# Altium PCB USB Power Adapter.PcbDoc
Units mm, origin at the board's own origin, x right, y up, seen from the top; angles counter-clockwise.
Board outline 35 x 22.5 mm, 2 copper layers (Top Layer, Bottom Layer), stack 1.621 mm thick; 5 components, 2 nets, 46 pads, 4 vias.
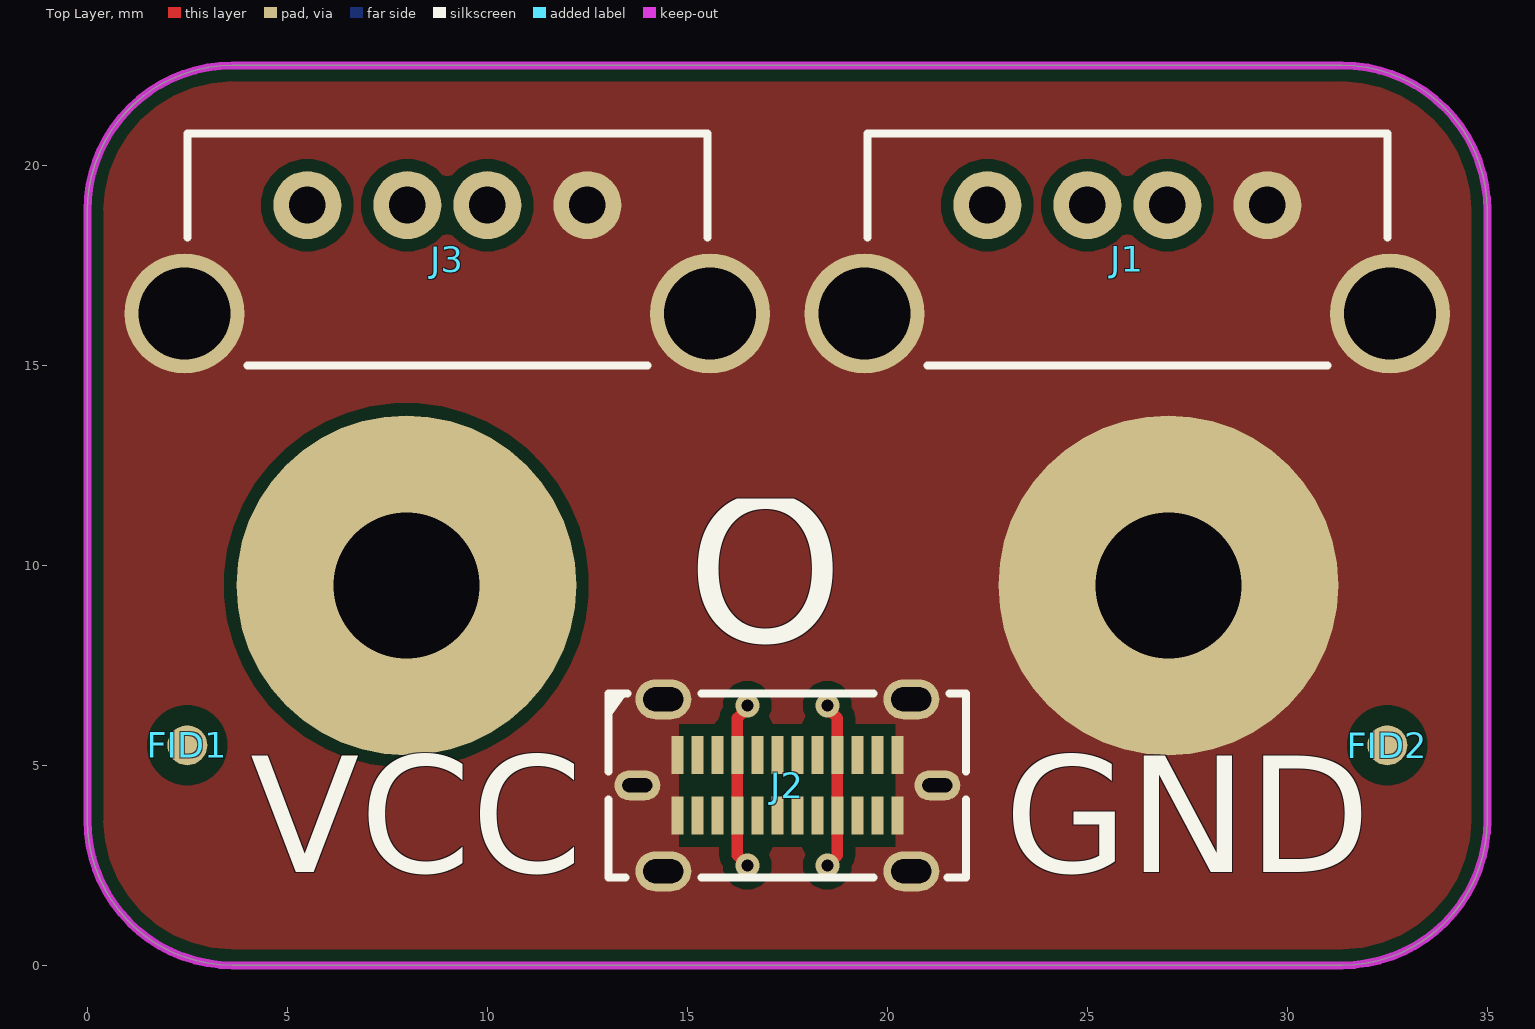
[diagram p0: Top Layer view]
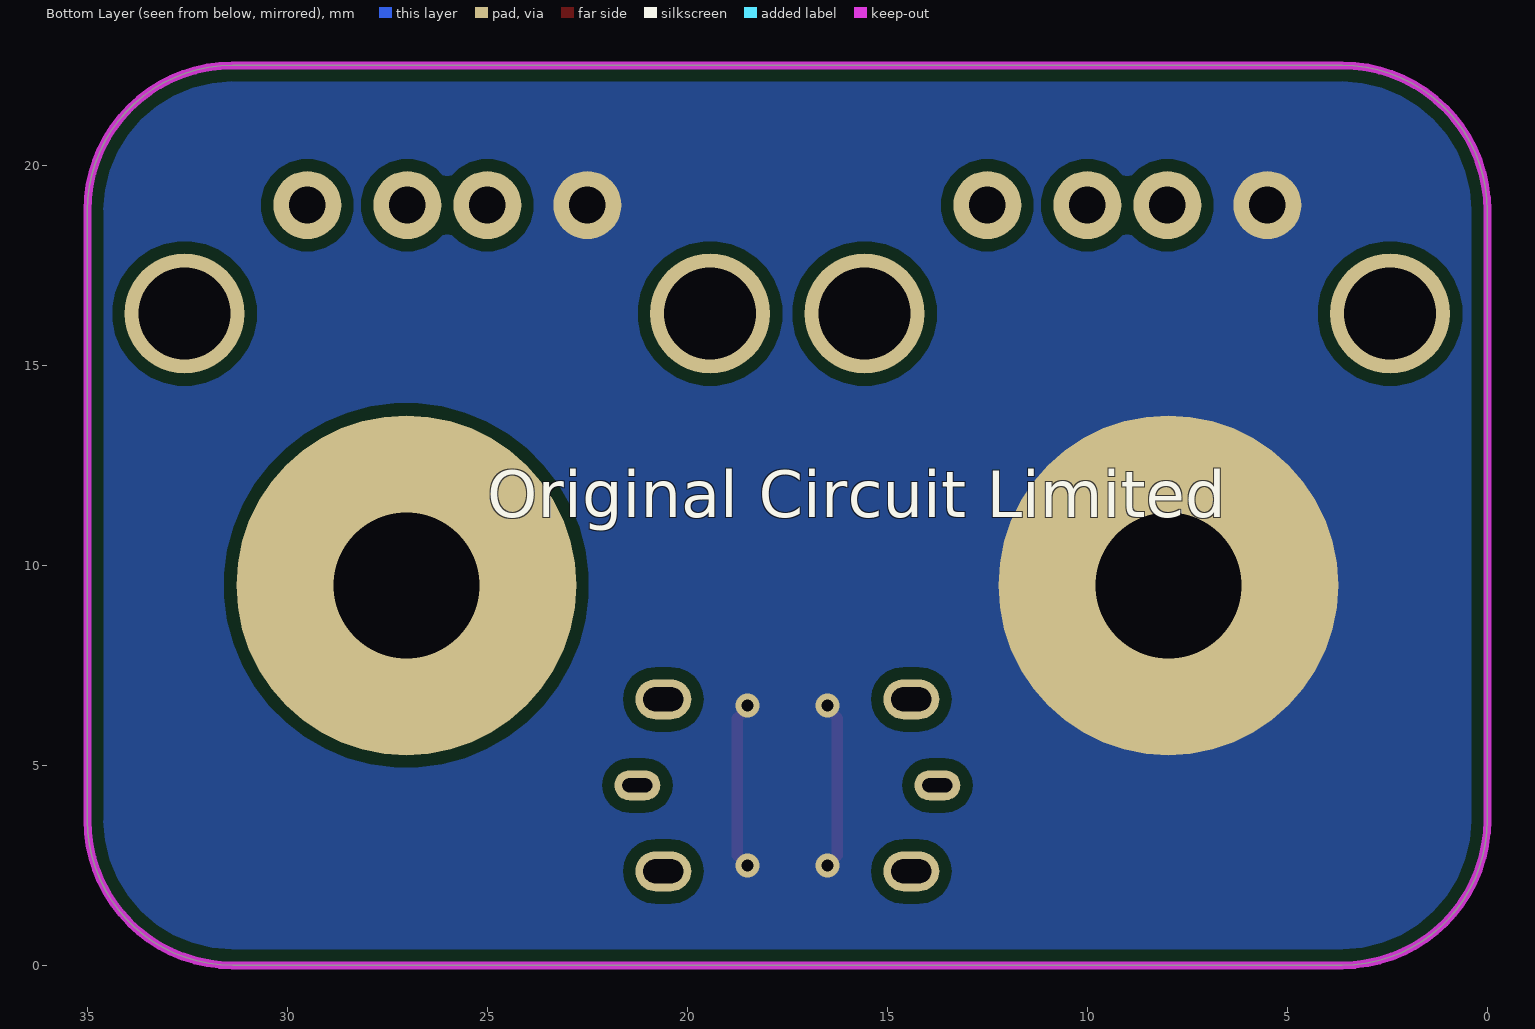
[diagram p1: Bottom Layer view, seen from below]
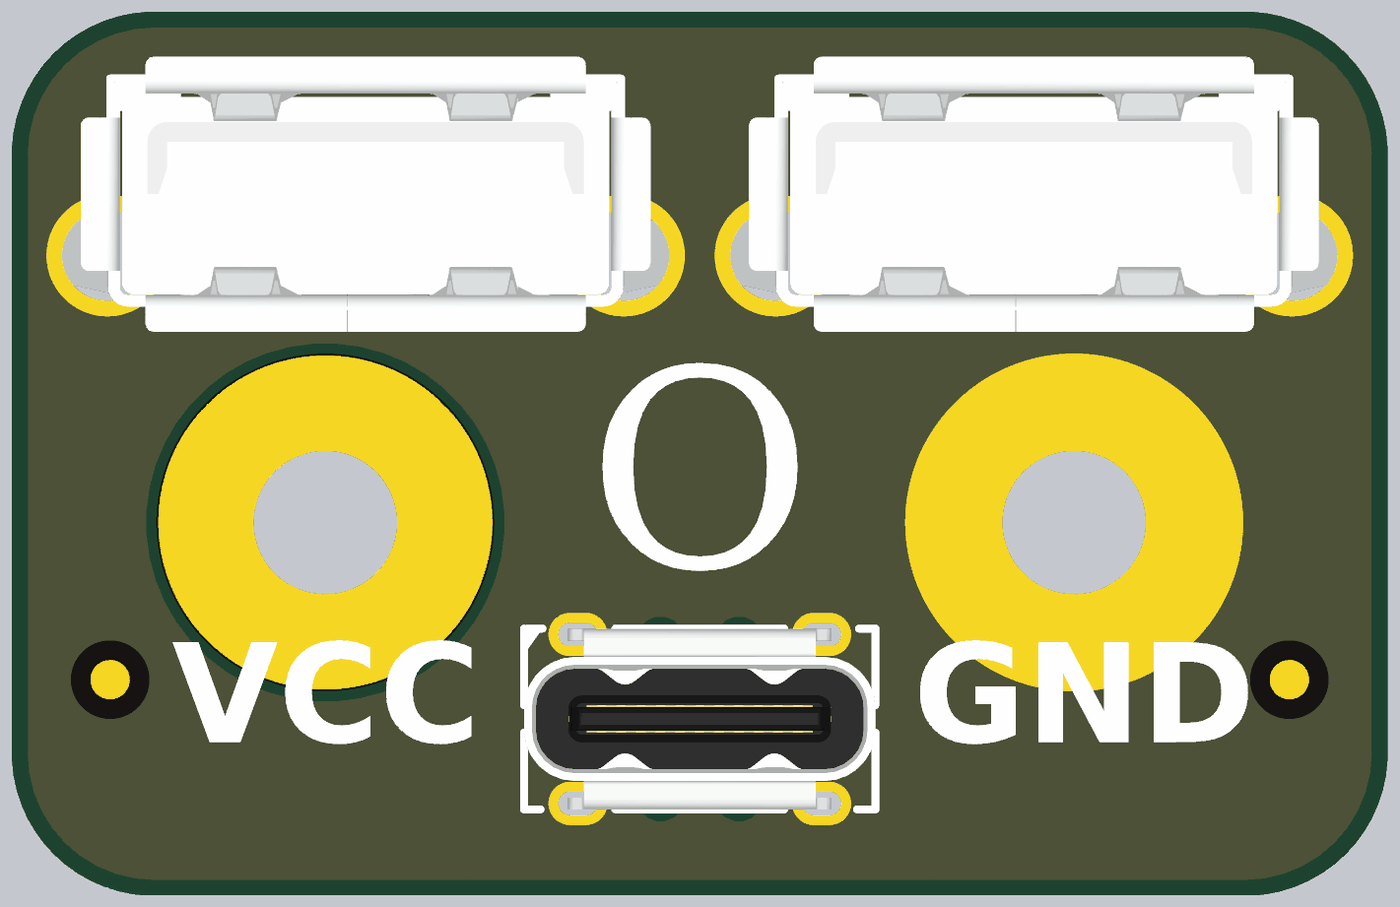
[diagram p2: 3D render of the assembled board from above, using the file's embedded part models]

## Layer stack, top to bottom
Top Solder: solder mask 0.0102, Solder Resist, Dk 3.8
Top Layer: signal copper 0.0356
Dielectric 1: dielectric 1.55, FR-4, Dk 4.6
Bottom Layer: signal copper 0.0356
Bottom Solder: solder mask 0.0102, Solder Resist, Dk 3.8

## Board outline
0,3.632 0,18.868 cw(c3.632,18.868) 3.632,22.5 31.368,22.5 cw(c31.368,18.868) 35,18.868 35,3.632 cw(c31.368,3.632) 31.368,0 3.632,0 cw(c3.632,3.632)

## Design rules (kind name [scope] priority, off if disabled: settings)
Clearance [All] p1: gap=0.3 ignorepadtopadclearanceinfootprint=FALSE except(0.15: Arc-SMDPad Track-SMDPad SMDPad-SMDPad)
ComponentClearance [All] p1: gap=0.254 collisioncheckmode=3 verticalgap=0.254 showdistances=TRUE
MinimumSolderMaskSliver [All] p1: minsoldermaskwidth=0.1
PlaneClearance [All] p1: clearance=0.2
PolygonConnect [All] p1: connectstyle=Direct reliefconductorwidth=0.254 reliefentries=4 polygonreliefangle="90 Angle" airgapwidth=0.254
RoutingVias [All] p1: holewidth=0.3 width=0.6 viastyle="Through Hole" minholewidth=0.15 minwidth=0.45 maxholewidth=6.3 maxwidth=6.6
SilkToSilkClearance [All] p1: silktosilkclearance=-3
SilkToSolderMaskClearance [IsPad] p1: minsilkscreentomaskgap=-3 clearancetoexposedcopper=TRUE
SolderMaskExpansion SolderMaskExpansion_Via [IsVia] p1: expansion=0.102 istentingtop=TRUE
SolderMaskExpansion [All] p2: expansion=0.05 istentingtop=FALSE
Width [All] p1: maxlimit=3 minlimit=0.09 preferedwidth=0.2
25 further rules are at their usual default settings.

## Components (designator, comment, footprint, x,y, rotation, side; value= is the part's Value field where it differs from the comment)
FID1 "Fiducial" Fiducial-1mm 2.5,5.5 r90 top
FID2 "Fiducial" Fiducial-1mm 32.5,5.5 r90 top
J1 "1002-021-01000" "CNC TECH 1002-021-01000" 26,17.5 r0 top
J2 "2047110001" "Molex 2047110001" 17.5,4.5 r0 top
J3 "1002-021-01000" "CNC TECH 1002-021-01000" 9,17.5 r0 top

## Footprints (in the part's own frame and the unit in brackets; to place one, negate y for a bottom-side part, rotate by r counter-clockwise, add the part's x,y. Pads: shape width x height; smd on the part's side, far side on the other; paste and mask are expansions set on the pad)
"CNC TECH 1002-021-01000" [mm] "USB2.0 TYPEA 4 Pin Pitch 2-2.5mm"
  round 1.7 hole 0.92: 1(-3.5,1.505) 2(-1,1.505) 3(1,1.505) 4(3.5,1.505)
  round 3 hole 2.3: S(-6.57,-1.205) S(6.57,-1.205)
  silkscreen extent -6.5,-2.5 6.5,3.3, body extent -7.89,-3.14 7.89,3.86, height 15
Fiducial-1mm [mm]
  round 1 smd paste-1 mask+0.5: F(0,0)
  Top Layer pour cut-out: -1,0 -0.924,0.383 -0.707,0.707 -0.383,0.924 0,1 0,1 0.383,0.924 0.707,0.707 0.924,0.383 1,0 1,0 0.924,-0.383 0.707,-0.707 0.383,-0.924 0,-1 0,-1 -0.383,-0.924 -0.707,-0.707 -0.924,-0.383 -1,0
"Molex 2047110001" [mm] "USB-C Receptacle Connector 24 Position Surface Mount, 24 Connectors, Body 4.60x9.05mm"
  rect 0.3x0.95 smd: A1(-2.75,0.755) A2(-2.25,0.755) A3(-1.75,0.755) A4(-1.25,0.755) A5(-0.75,0.755) A6(-0.25,0.755) A7(0.25,0.755) A8(0.75,0.755) A9(1.25,0.755) A10(1.75,0.755) A11(2.25,0.755) A12(2.75,0.755) B1(2.75,-0.755) B2(2.25,-0.755) B3(1.75,-0.755) B4(1.25,-0.755) B5(0.75,-0.755) B6(0.25,-0.755) B7(-0.25,-0.755) B8(-0.75,-0.755) B9(-1.25,-0.755) B10(-1.75,-0.755) B11(-2.25,-0.755) B12(-2.75,-0.755)
  oval 1.15x0.75 hole 0.35 slot 0.75 at 0 deg: S(-3.75,0) S(3.75,0)
  oval 1.4x1 hole 0.6 slot 1 at 0 deg: S(-3.1,-2.15) S(-3.1,2.15) S(3.1,-2.15) S(3.1,2.15)
  silkscreen extent -4.5,-2.3 4.47,2.3, body extent -4.47,-2.3 4.47,2.3, height 9.05

## Part data
FID1 FID2: library part CMP-002-000000-1, Component Type=Standard, Design Item ID=Fiducial, Pin Count=0, Source=Fiducial.SchLib
J1 J3: "CONN RCPT USB2.0 TYPEA 4POS VERT", Current Rating (Amps)=1.5A, Manufacturer="CNC Tech", Operating Temperature="-55°C ~ 85°C", Supplier Part Number 1=1175-1265-ND, Voltage - Rated=30V, ComponentLink1Description=Datasheet, ComponentLink1URL=http://www.cnctech.us/pdfs/1002-021-01000.pdf, ComponentLink2Description="DigiKey Link", ComponentLink2URL=http://digikey.com/product-detail/en/cnc-tech/1002-021-01000/1175-1265-ND/3466946, Connector Type="USB - A", Features="Board Lock", Gender=Receptacle, LastUpdated="30/04/2020 12:00:08", Lifecycle Status=Active, Mating Cycles=1500, Minimum Order=1, Mounting Feature=Vertical, Mounting Type="Through Hole", Number of Contacts=4, Number of Ports=1, Packaging=Tray, Part Number=1002-021-01000, Part Status=Active, Price=1.02, Series=-, Specifications="USB 2.0", Supplier 1=DigiKey, Termination=Solder
J2: "USB VERTICAL TYPE C 3.1", Current Rating (Amps)="0.25A, 1.25A, 5A", Manufacturer=Molex, Operating Temperature="-30°C ~ 85°C", Supplier Part Number 1=900-2047110001CT-ND, Voltage - Rated=30VAC/DC, ComponentLink1Description=Datasheet, ComponentLink1URL=https://www.molex.com/webdocs/datasheets/pdf/en-us/2047110001_IO_CONNECTORS.pdf, ComponentLink2Description="DigiKey Link", ComponentLink2URL=http://digikey.com/product-detail/en/molex/2047110001/900-2047110001CT-ND/10440494, Connector Type="USB - C (Type - C)", Features="Board Lock, Pick and Place Cap", Gender=Receptacle, LastUpdated="06/06/2020 02:12:39", Lifecycle Status=Active, Mating Cycles=10000, Minimum Order=1, Mounting Feature=Vertical, Mounting Type="Surface Mount, Through Hole", Number of Contacts=24, Number of Ports=1, Packaging=CutTape, Part Number=2047110001, Part Status=Active, Price=1.78, Series=204711, Shielding=Shielded, Specifications="USB 3.1 (USB 3.1 Gen 2, Superspeed+)", Supplier 1=DigiKey, Termination=Solder

## Free pads (board coordinates)
  round 8.5 hole 3.65 paste-2539.97: NEG(27.025,9.5) POS(7.975,9.5)

## Via types
v1: diameter 0.6, hole 0.3, Top Layer to Bottom Layer, tented both sides, 4 vias

## Nets (pads, with @x,y where several pads share a name; then routed paths per layer and width w, separated by ;. In a path a pad name is that pad's centre, name@x,y a point inside that pad or via, vN(x,y) a via of type N, cw(c..) or ccw(c..) an arc to the next point about the centre after c; other vN are vias at no path point)
GND: J1.4 J1.S J2.A1 J2.A12 J2.B1 J2.B12 J2.S J3.4 J3.S pad.NEG
VCC: J1.1 J2.A4 J2.A9 J2.B4 J2.B9 J3.1 pad.POS | length 8.4
  Top Layer w0.28: v1(16.5,2.5) 16.25,2.75 J2.B9 J2.A4 16.25,6.18 16.5,6.43 v1(16.5,6.5) ; v1(18.5,2.5) 18.75,2.75 J2.B4 J2.A9 18.75,6.18 18.5,6.43 v1(18.5,6.5)
pads on no net: FID1.F FID2.F J1.2 J1.3 J2.A2 J2.A3 J2.A5 J2.A6 J2.A7 J2.A8 J2.A10 J2.A11 J2.B2 J2.B3 J2.B5 J2.B6 J2.B7 J2.B8 J2.B10 J2.B11 J3.2 J3.3

## Polygon pours and split planes (outlines as drawn)
GND on Top Layer "GND_L01_P000" (solid, remove dead copper, pour order 0): 0,0 0,22.5 35,22.5 35,0
VCC on Bottom Layer "VCC_L02_P001" (solid, remove dead copper, pour order 1): 0,0 0,22.5 35,22.5 35,0

## Keep-outs
Keep-Out Layer:
  the board outline again, w0.2

## Silkscreen, mask and mechanical layers (free items; w line width, h text height)
Top Overlay:
  text "O" at 14.988,6.185 h10
  text "VCC" at 4.07,1.366 h5
  text "GND" at 22.928,1.366 h5
Bottom Overlay:
  text "Original Circuit Limited" at 25,10.812 h2
Route Tool Path:
  lines w2: -1,7 -1,3.632 ccw(c3.632,3.632) 3.632,-1 31.368,-1 ccw(c31.368,3.632) 36,3.632 36,7 ; -1,16 -1,18.868 ; 36,16 36,18.868 ccw(c31.368,18.868) 31.368,23.5 3.632,23.5 ccw(c3.632,18.868) -1,18.868 ; -1,18.868 ccw(c-1,18.868) -1,18.868